# Altium PCB urbanturbine_rev4.PcbDoc
Units mil, origin at the board's own origin, x right, y up, seen from the top; angles counter-clockwise.
Board outline 3680 x 3690 mil, 2 copper layers (Top Layer, Bottom Layer); 52 components, 48 nets, 213 pads, 11 vias.
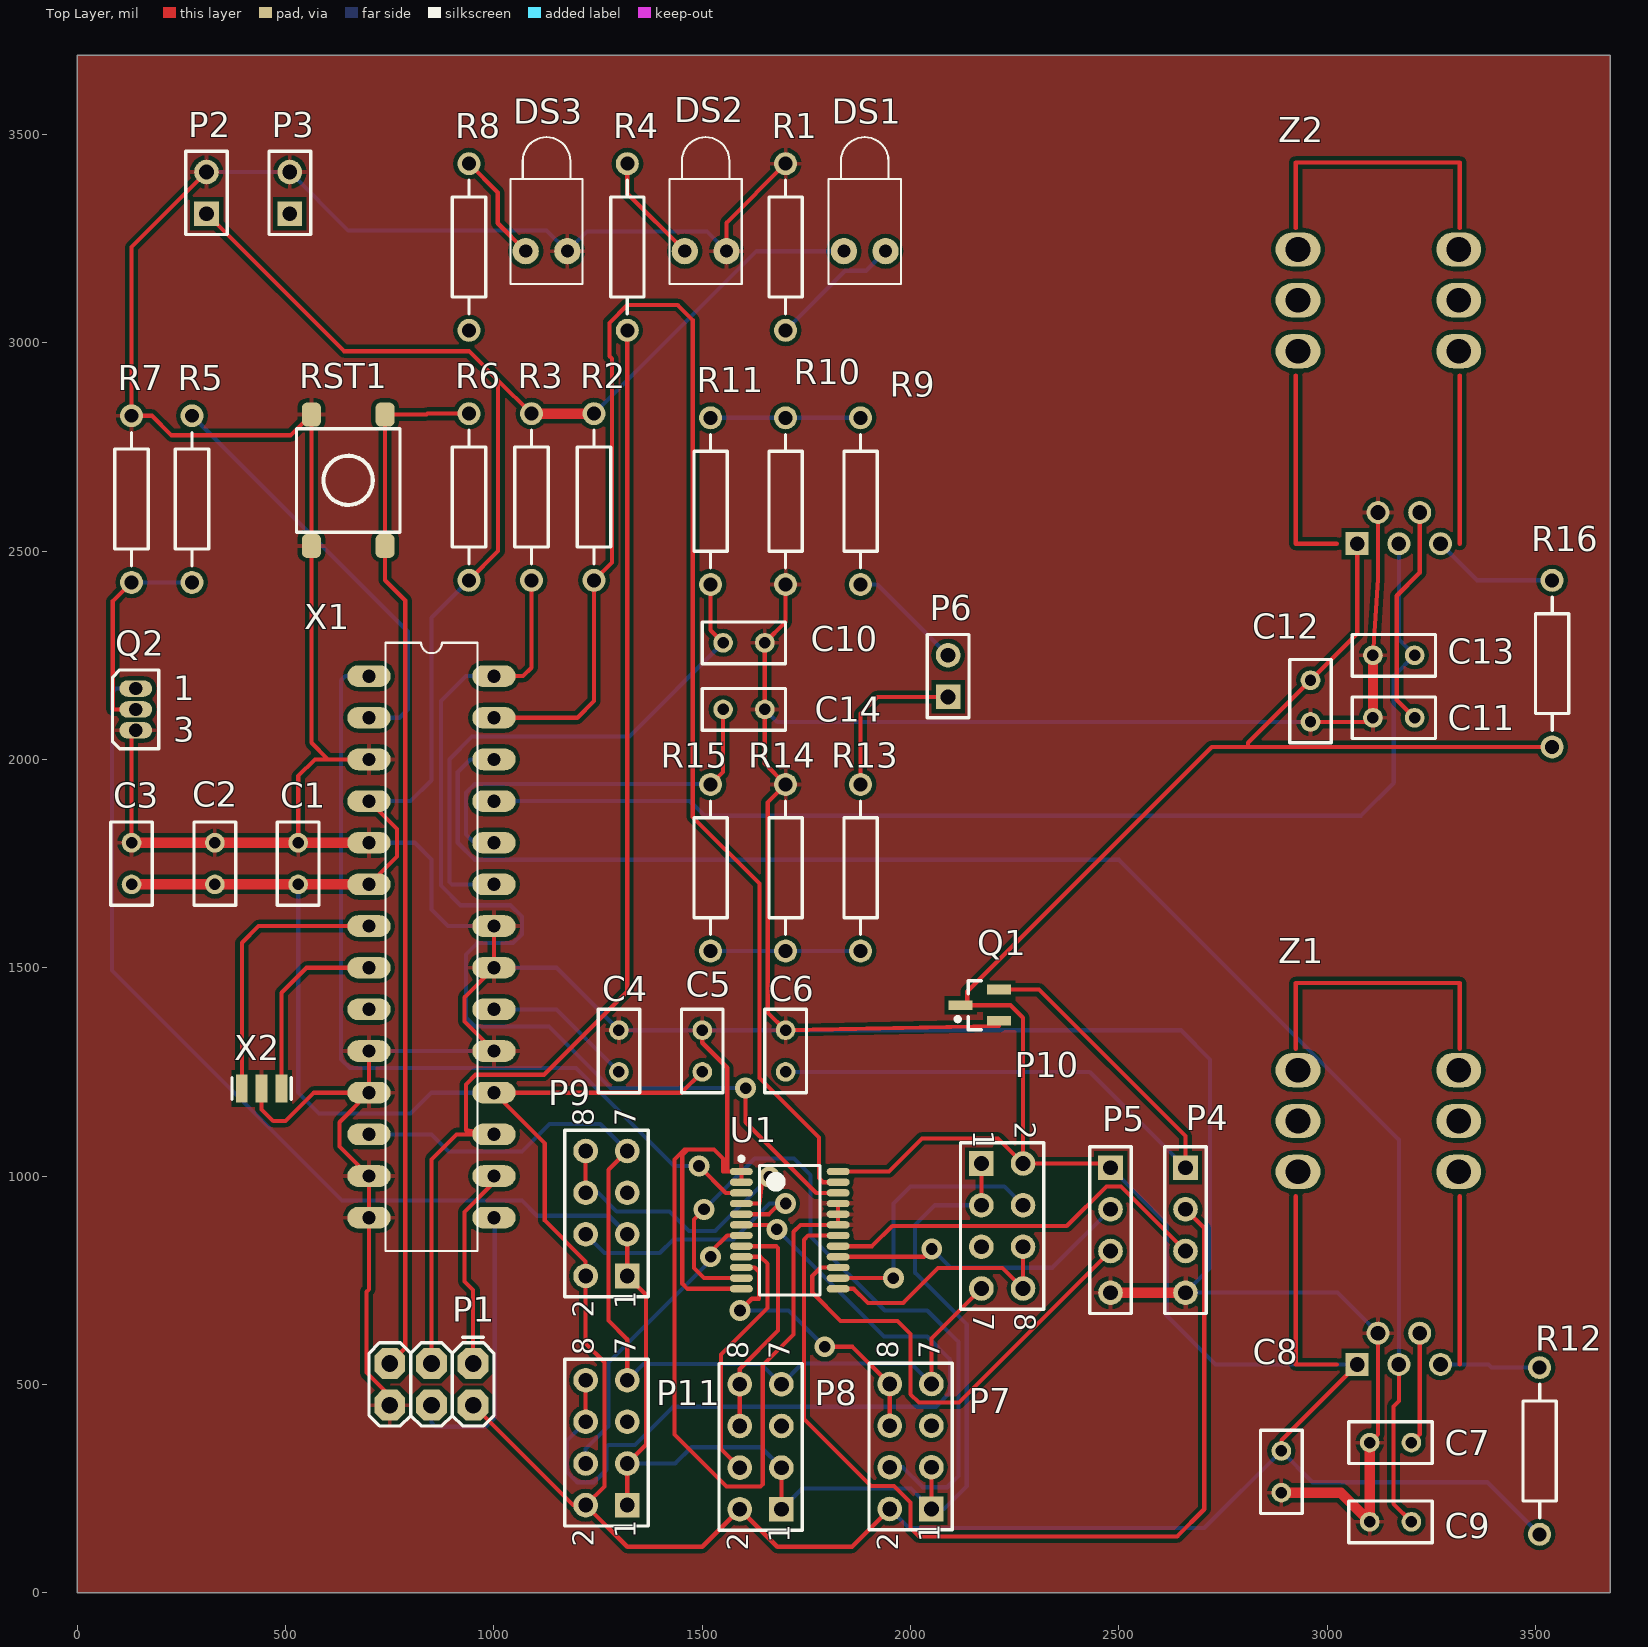
[diagram p0: Top Layer view]
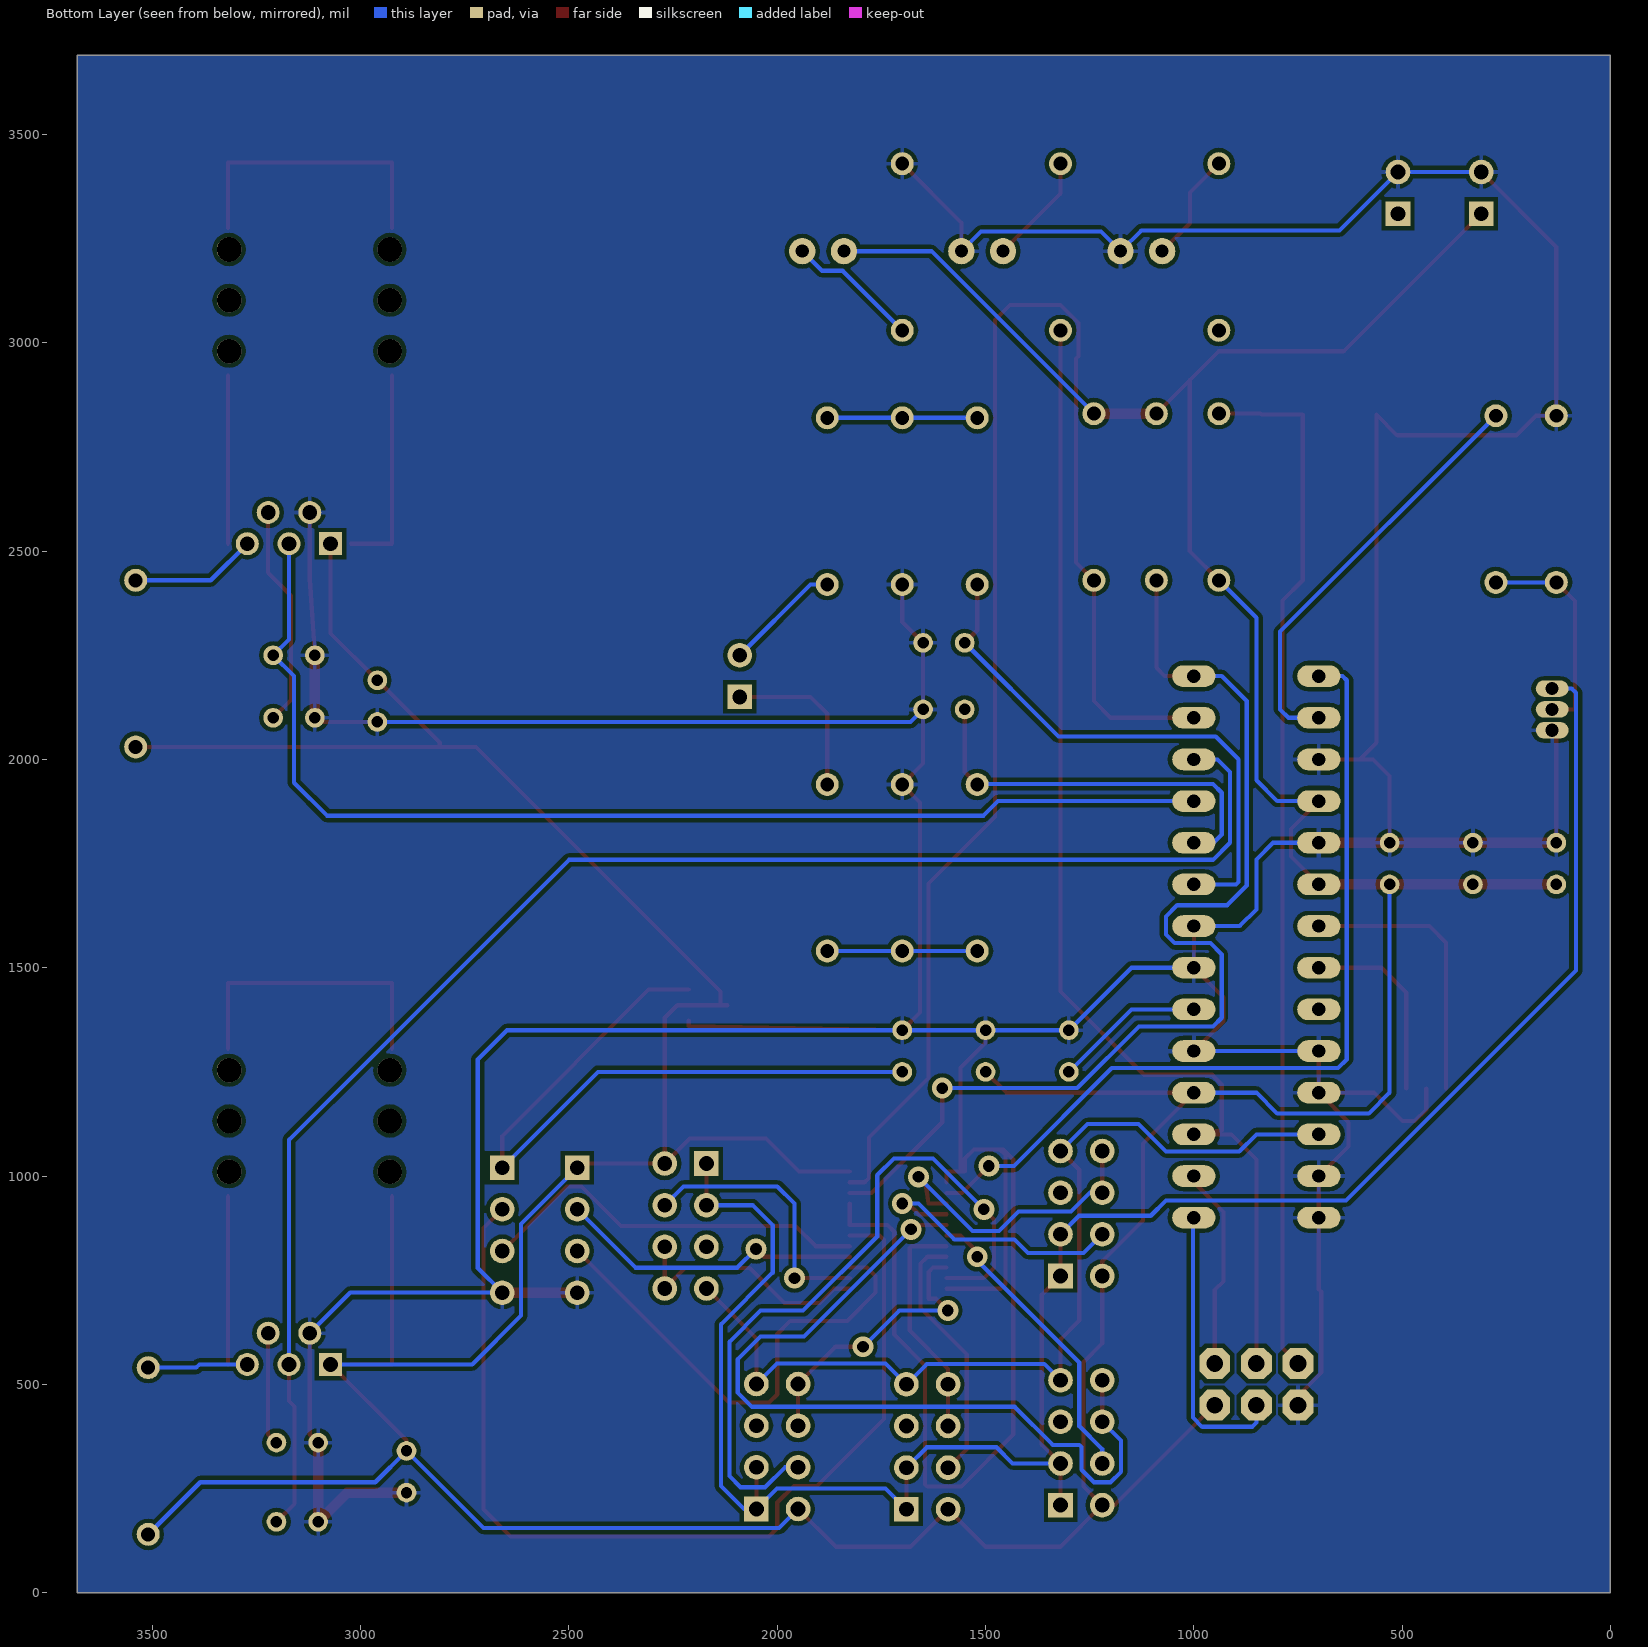
[diagram p1: Bottom Layer view, seen from below]

## Layer stack, top to bottom
Top Solder: solder mask 0.4, Solder Resist, Dk 3.5
Top Layer: signal copper 1.4
Dielectric 1: dielectric 12.6, FR-4, Dk 4.8
Bottom Layer: signal copper 1.4
Bottom Solder: solder mask 0.4, Solder Resist, Dk 3.5

## Board outline
0,0 3680,0 3680,3690 0,3690

## Design rules (kind name [scope] priority, off if disabled: settings)
Clearance [All] p1: gap=10 ignorepadtopadclearanceinfootprint=FALSE except(0: Arc-Hole Track-Hole SMDPad-Hole THPad-Hole Via-Hole Fill-Hole Poly-Hole Region-Hole Text-Hole; 1: SMDPad-SMDPad)
PolygonConnect [All] p1: connectstyle=Relief reliefconductorwidth=10 reliefentries=4 polygonreliefangle="90 Angle" airgapwidth=10
RoutingVias [All] p1: holewidth=28 width=50 viastyle="Through Hole" minholewidth=28 minwidth=50 maxholewidth=28 maxwidth=50
SolderMaskExpansion [All] p1: expansion=4
Width [All] p1: maxlimit=25 minlimit=10 preferedwidth=10 minimp=50.000000 maximp=50.000000 favimp=50.000000
30 further rules are at their usual default settings.

## Classes and differential pairs
component class urbanturbine: C1 C2 C3 C4 C5 C6 DS1 DS2 DS3 P1 P2 P3 P4 P5 Q1 Q2 R1 R2 R3 R4 R5 R6 R7 R8 RST1 U1 X1 X2
component class sensors: C7 C8 C9 C10 C11 C12 C13 C14 P6 R9 R10 R11 R12 R13 R14 R15 R16 Z1 Z2
component class displays: P7 P8 P9 P10 P11

## Components (designator, comment, footprint, x,y, rotation, side; value= is the part's Value field where it differs from the comment)
C1 "Cap Pol1" RAD-0.1 530,1750 r90 top value=100pF
C2 "Cap Pol1" RAD-0.1 330,1750 r90 top value=0.1uF
C3 "Cap Pol1" RAD-0.1 130,1750 r90 top value=0.1uF
C4 "C1005X7R1H104K050BB" RAD-0.1 1300,1300 r270 top value=0.1uF
C5 "Cap" RAD-0.1 1500,1300 r270 top value=1uF
C6 "Cap" RAD-0.1 1700,1300 r270 top value=1uF
C7 "Cap" RAD-0.1 3152.13,360 r180 top value=47uF
C8 "Cap" RAD-0.1 2890,290 r90 top value=47uF
C9 "Cap" RAD-0.1 3152.13,170 r180 top value=4.7uF
C10 "Cap" RAD-0.1 1600,2280 r180 top value=100nF
C11 "Cap" RAD-0.1 3160,2100 r180 top value=47uF
C12 "Cap" RAD-0.1 2960,2140 r90 top value=47uF
C13 "Cap" RAD-0.1 3160,2250 r180 top value=4.7uF
C14 "Cap" RAD-0.1 1600,2120 r180 top value=100nF
DS1 "LTST-C191KGKT" LED-1 1890,3220 r90 top
DS2 "LTST-C191KRKT" LED-1 1508.07,3220 r90 top
DS3 "LTST-C191KRKT" LED-1 1126.14,3220 r90 top
P1 "M20-9980346" 2X3 950,550 r180 top
P2 "" HDR1X2 310,3310 r90 top
P3 "" HDR1X2 510,3310 r90 top
P4 "" HDR1X4 2660,1020 r270 top
P5 "" HDR1X4 2480,1020 r270 top
P6 "" HDR1X2 2090,2150 r90 top
P7 "" HDR2X4 2050,200.78 r90 top
P8 "SPEED_DISP" HDR2X4 1690,200 r90 top
P9 "TEMP_DISP" HDR2X4 1320,760 r90 top
P10 "CRANK_DISP" HDR2X4 2170,1030 r270 top
P11 "HUMIDITY_DISP" HDR2X4 1320,210 r90 top
Q1 "AP2138N-3.3TRG1" SOT23_M 2166.26,1410 r180 top
Q2 "MOSFET-N" E3 140,2120 r0 top
R1 "RC0603JR-071KL" AXIAL-0.4 1700,3230 r90 top value=1k
R2 "Res2" AXIAL-0.4 1240,2630 r90 top value=4.7k
R3 "Res2" AXIAL-0.4 1090,2630 r90 top value=4.7k
R4 "Res1" AXIAL-0.4 1320,3230 r90 top value=1k
R5 "ERJ-3EKF1002V" AXIAL-0.4 275,2625 r90 top value=100
R6 "Res1" AXIAL-0.4 940,2630 r90 top value=1k
R7 "Res2" AXIAL-0.4 130,2625 r90 top value=1M
R8 "Res1" AXIAL-0.4 940,3230 r90 top value=1k
R9 "Res2" AXIAL-0.4 1880,2620 r270 top value=90k
R10 "Res2" AXIAL-0.4 1700,2620 r270 top value=10k
R11 "Res2" AXIAL-0.4 1520,2620 r90 top value=10
R12 "Res2" AXIAL-0.4 3510,340 r270 top value=10k
R13 "Res2" AXIAL-0.4 1880,1740 r90 top value=90k
R14 "Res2" AXIAL-0.4 1700,1740 r90 top value=10k
R15 "Res2" AXIAL-0.4 1520,1740 r270 top value=10
R16 "Res2" AXIAL-0.4 3540,2230 r270 top value=10k
RST1 "PTS645SH50SMTR92 LFS" "TACTILE SWITCH SMD" 650,2670 r90 top
U1 "TCA9548A" TCA9548A 1710,870 r0 top
X1 "ATMEGA328P-MU" *DIL28 850,1550 r0 top
X2 "16MHz" RESONATOR-SMD 442.38,1210 r0 top
Z1 "LEM HO-25P" HO-25 3022.91,547.8 r90 top
Z2 "LEM HO-6P" HO-25 3022.91,2517.8 r90 top

## Footprints (in the part's own frame and the unit in brackets; to place one, negate y for a bottom-side part, rotate by r counter-clockwise, add the part's x,y. Pads: shape width x height; smd on the part's side, far side on the other; paste and mask are expansions set on the pad)
2X3 [mil] "2X3"
  oct 74x74 hole 40: 1(0,0) 2(0,100) 3(100,0) 4(100,100) 5(200,0) 6(200,100)
  silkscreen extent -50,-63 250,150, body extent -50,-49 250,149, height 335
*DIL28 [mil]
  oval 104x52 hole 32: 1(-150,650) 2(-150,550) 3(-150,450) 4(-150,350) 5(-150,250) 6(-150,150) 7(-150,50) 8(-150,-50) 9(-150,-150) 10(-150,-250) 11(-150,-350) 12(-150,-450) 13(-150,-550) 14(-150,-650) 15(150,-650) 16(150,-550) 17(150,-450) 18(150,-350) 19(150,-250) 20(150,-150) 21(150,-50) 22(150,50) 23(150,150) 24(150,250) 25(150,350) 26(150,450) 27(150,550) 28(150,650)
  silkscreen extent -110,-730 110,730, body extent -315,-730 110,730, height 314
AXIAL-0.4 [mm] "Axial Device, Thru-Hole; 2 Leads; 0.4 in Pin Spacing"
  round 1.4 hole 0.85: 1(-5.08,0) 2(5.08,0)
  silkscreen extent -4.06,-1.02 4.06,1.02
E3 [mm] "TO, Flat Index; 3 In-Line, Axial Leads; Body Dia. 4.6mm; Lead Dia. 0.5 mm (max)"
  oval 2x1 hole 0.8: 1(0,1.27) 2(0,0) 3(0,-1.27)
  silkscreen extent -1.41,-2.41 1.41,2.41
HDR1X2 [mm] "Connector; Header; 2 Position"
  rect 1.5x1.5 hole 0.9: 1(0,0)
  round 1.5 hole 0.9: 2(2.54,0)
  silkscreen extent -1.27,-1.27 3.81,1.27
HDR1X4 [mm] "Connector; Header; 4 Position"
  rect 1.5x1.5 hole 0.9: 1(0,0)
  round 1.5 hole 0.9: 2(2.54,0) 3(5.08,0) 4(7.62,0)
  silkscreen extent -1.27,-1.27 8.89,1.27
HDR2X4 [mm] "Connector; Header; 4x2 Position"
  rect 1.5x1.5 hole 0.9: 1(0,0)
  round 1.5 hole 0.9: 2(0,2.54) 3(2.54,0) 4(2.54,2.54) 5(5.08,0) 6(5.08,2.54) 7(7.62,0) 8(7.62,2.54)
  silkscreen extent -1.27,-1.27 8.89,3.81
HO-25 [mm]
  rect 1.4x1.4 / inner rect 2.5x1.4 / far side rect 1.4x1.4 hole 0.9: 1(0,-1.25)
  round 1.4 / inner oval 2.5x1.4 / far side round 1.4 hole 0.9: 2(1.905,-2.52) 3(0,-3.79) 4(1.905,-5.06) 5(0,-6.33)
  oval 2.1x2.74 / inner round 1.5 / far side round 1.5 hole 1.5: ""(11.74,-7.44) ""(11.74,2.36) ""(14.84,-7.44) ""(14.84,2.36) ""(17.94,-7.44) ""(17.94,2.36)
  Top Layer lines w0.254: 10.25,2.5 0,2.5 0,0 ; 19.25,2.5 23.25,2.5 23.25,-7.5 19.25,-7.5 ; 0,-7.5 10.25,-7.5
  body extent -0.22,-8.5 23.72,3.5, height 20.8
LED-1 [mm] "LED; 2 Leads"
  round 1.6 hole 0.8: 1(0,1.27) 2(0,-1.27)
  silkscreen extent -2,-2.2 6.95,2.2
RAD-0.1 [mm] "Radial Cap, Thru-Hole; 2 Leads; 0.1 in Pin Spacing"
  round 1.2 hole 0.7: 1(-1.27,0) 2(1.27,0)
  silkscreen extent -2.54,-1.27 2.54,1.27
RESONATOR-SMD [mil] "RESONATOR-SMD"
  rect 28x67 smd: 1(-47.62,0) 2(-0.38,0) 3(47.62,0)
  silkscreen extent -71,-26 71,26
SOT23_M [mm] "SOT23, 3-Leads, Body 2.9x1.3mm, Pitch 0.95mm, Lead Span 2.3mm - Reverse Pinning, IPC Low Density"
  rect 1.45x0.6 smd: 1(1.175,0) 2(-1.175,-0.95) 3(-1.175,0.95)
  silkscreen extent -0.1,-1.5 1.47,1.5, body extent -0.7,-1.5 0.7,1.5, height 1.1
"TACTILE SWITCH SMD" [mil] "Switch, Through-Hole, 4 Leads, Body 8.5x8.5mm, Row Spacing 9.0mm, Pitch 4.5mm"
  rrect50% 57x45 smd: 1(157.87,-88.58) 2(-157.48,-88.58) 3(157.87,88.19) 4(-157.48,88.19)
  silkscreen extent -124,-124 124,124, body extent -177,-122 177,122, height 177
TCA9548A [mm] "TSOP, 24-Leads, Body 7.80x4.40mm, Pitch 0.65mm, IPC Medium Density"
  oval 1.4x0.45 smd: 1(-2.95,3.575) 2(-2.95,2.925) 3(-2.95,2.275) 4(-2.95,1.625) 5(-2.95,0.975) 6(-2.95,0.325) 7(-2.95,-0.325) 8(-2.95,-0.975) 9(-2.95,-1.625) 10(-2.95,-2.275) 11(-2.95,-2.925) 12(-2.95,-3.575) 13(2.95,-3.575) 14(2.95,-2.925) 15(2.95,-2.275) 16(2.95,-1.625) 17(2.95,-0.975) 18(2.95,-0.325) 19(2.95,0.325) 20(2.95,0.975) 21(2.95,1.625) 22(2.95,2.275) 23(2.95,2.925) 24(2.95,3.575)
  silkscreen extent -3.07,-3.95 1.85,4.47, body extent -3.27,-3.96 3.28,3.93, height 1.2

## Part data
C1 C2 C3 C4: library part Cap, "Capacitor", LatestRevisionDate=17-Jul-2002, LatestRevisionNote="Re-released for DXP Platform.", PackageDescription="Radial Cap, Thru-Hole; 2 Leads; 0.3 in Pin Spacing", PackageReference=RAD-0.3, Published=8-Jun-2000, Publisher="Altium Limited"
C5 C6 C7 C8 C9 C10 C11 C12 C13 C14: "Capacitor", LatestRevisionDate=17-Jul-2002, LatestRevisionNote="Re-released for DXP Platform.", PackageDescription="Radial Cap, Thru-Hole; 2 Leads; 0.3 in Pin Spacing", PackageReference=RAD-0.3, Published=8-Jun-2000, Publisher="Altium Limited"
DS1 DS2 DS3: library part LED1, "Typical RED GaAs LED", LatestRevisionDate=08-Jul-2005, LatestRevisionNote="Mech Layer 1 removed.", PackageDescription="LED; 2 Leads", PackageReference=LED-1, Published=8-Jun-2000, Publisher="Altium Limited"
P1: "DIL VERTICAL PC TAIL PIN HEADER", Color=Black, Manufacturer="Harwin Inc.", Supplier Part Number 1=952-2121-ND, Category="Connectors, Interconnects", ComponentLink1Description=http://cdn.harwin.com/pdfs/M20-998.pdf, ComponentLink1URL=http://cdn.harwin.com/pdfs/M20-998.pdf, Connector Type="Header, Unshrouded, Breakaway", Contact Finish=Tin, Contact Finish Thickness=-, Contact Mating Length="0.240\" (6.10mm)", Contact Type="Male Pin", Fastening Type=-, Features=-, Manufacturer Part Number=M20-9980346, Mounting Type="Through Hole", Number of Positions=6, Number of Positions Loaded=All, Number of Rows=2, Packaging=Bulk, Pitch="0.100\" (2.54mm)", Pricing 1="1=0.32, 10=0.299, 25=0.2552, 50=0.2232, 100=0.2072, 250=0.18336, 500=0.17534, 1000=0.14346, 2500=0.13151 (CAD)", RoHS="RoHS Compliant", Row Spacing="0.100\" (2.54mm)", Stock 1=14297, Supplier 1=Digi-Key, Termination=Solder
P2 P3 P6: library part "Header 2", "Header, 2-Pin", LatestRevisionDate=17-Jul-2002, LatestRevisionNote="Re-released for DXP Platform.", Publisher="Altium Limited"
P4 P5: library part "Header 4", "Header, 4-Pin", LatestRevisionDate=17-Jul-2002, LatestRevisionNote="Re-released for DXP Platform.", Publisher="Altium Limited"
P7 P8 P9 P10 P11: library part "Header 4X2", "Header, 4-Pin, Dual row", LatestRevisionDate=17-Jul-2002, LatestRevisionNote="Re-released for DXP Platform.", Publisher="Altium Limited"
Q1: "IC REG LINEAR 3.3V 250MA SOT23-3"
Q2: "N-Channel MOSFET", LatestRevisionDate=17-Jul-2002, LatestRevisionNote="Re-released for DXP Platform.", PackageDescription="TO, Flat Index; 3 In-Line, Axial Leads; Body Dia. 4.6mm; Lead Dia. 0.5 mm (max)", PackageReference=E3, PackageVersion=1995/1996, Published=8-Jun-2000, Publisher="Altium Limited"
R1 R4 R5 R6 R8: library part Res2, "Resistor", LatestRevisionDate=17-Jul-2002, LatestRevisionNote="Re-released for DXP Platform.", PackageDescription="Axial Device, Thru-Hole; 2 Leads; 0.4 in Pin Spacing", PackageReference=AXIAL-0.4, Published=8-Jun-2000, Publisher="Altium Limited"
R2 R3 R7 R9 R10 R11 R12 R13 R14 R15 R16: "Resistor", LatestRevisionDate=17-Jul-2002, LatestRevisionNote="Re-released for DXP Platform.", PackageDescription="Axial Device, Thru-Hole; 2 Leads; 0.4 in Pin Spacing", PackageReference=AXIAL-0.4, Published=8-Jun-2000, Publisher="Altium Limited"
RST1: "SWITCH TACTILE SPST-NO 0.05A 12V", Contact Rating @ Voltage="0.05A @ 12VDC", Illumination Type, Color=-, Manufacturer="C&K Components", Operating Force=200gf, Operating Temperature="-20°C ~ 60°C", Supplier Part Number 1=CKN9085CT-ND, Actuator Height off PCB, from Pins=5.00mm, Actuator Material="Polyamide (PA66), Nylon 6/6", Actuator Orientation="Top Actuated", Actuator Type=Standard, Category=Switches, Circuit=SPST-NO, ComponentLink1Description=http://www.ck-components.com/14409/pts645_25apr13.pdf/, ComponentLink1URL=http://www.ck-components.com/14409/pts645_25apr13.pdf/, Features=-, Illumination=Non-Illuminated, Illumination Voltage (Nominal)=-, Ingress Protection=-, Manufacturer Part Number="PTS645SH50SMTR92 LFS", Mechanical Life="100,000 Cycles", Mounting Type="Surface Mount", Outline="6.00mm x 6.00mm", Packaging="Cut Tape (CT)", Pricing 1="1=0.43, 10=0.418, 25=0.404, 50=0.3892, 100=0.3675, 250=0.34592, 500=0.3315 (CAD)", RoHS="RoHS Compliant", Stock 1=49163, Supplier 1=Digi-Key, Switch Function=Off-Mom, Switch Travel=-, Termination Style="Gull Wing"
U1: "IIC multiplexor"
X1: "IC MCU 8BIT 32KB FLASH 32QFN", Manufacturer=Atmel, Operating Temperature="-40°C ~ 85°C", Package / Case="32-VFQFN Exposed Pad", Supplier Device Package="32-VQFN (5x5)", Supplier Part Number 1=ATMEGA328P-MU-ND, Voltage - Supply (Vcc/Vdd)="1.8 V ~ 5.5 V", Category="Integrated Circuits (ICs)", ComponentLink1Description=http://www.atmel.com/images/atmel-8271-8-bit-avr-microcontroller-atmega48a-48pa-88a-88pa-168a-168pa-328-328p_datasheet_summary.pdf, ComponentLink1URL=http://www.atmel.com/images/atmel-8271-8-bit-avr-microcontroller-atmega48a-48pa-88a-88pa-168a-168pa-328-328p_datasheet_summary.pdf, Connectivity="I²C, SPI, UART/USART", Core Processor=AVR, Core Size=8-Bit, Data Converters="A/D 8x10b", EEPROM Size="1K x 8", Manufacturer Part Number=ATMEGA328P-MU, Number of I/O=23, Oscillator Type=Internal, Packaging=Tray, Peripherals="Brown-out Detect/Reset, POR, PWM, WDT", Pricing 1="1=5.01, 10=4.465, 100=3.6608, 250=3.30364, 500=2.96432, 1000=2.50003 (CAD)", Program Memory Size="32KB (16K x 16)", Program Memory Type=FLASH, RAM Size="2K x 8", RoHS="RoHS Compliant", Speed=20MHz, Stock 1=70195, Supplier 1=Digi-Key
X2: library part CSTNE16M0VH3C000R0, "CER RESONATOR 16MHZ SMD", Capacitance=33pF, Frequency=10MHz, Frequency Stability=±0.2%, Frequency Tolerance=±0.5%, Manufacturer="Murata Electronics North America", Manufacturer Part Number=CSTCE10M0G55Z-R0, Operating Temperature="-40°C ~ 125°C", Package / Case="3-SMD, Non-Standard", Supplier Part Number 1=490-4715-1-ND, Category="Crystals and Oscillators", ComponentLink1Description=http://www.murata.com/~/media/webrenewal/support/library/catalog/products/timingdevice/ceralock/p16e.ashx, ComponentLink1URL=http://www.murata.com/~/media/webrenewal/support/library/catalog/products/timingdevice/ceralock/p16e.ashx, Features="Built in Capacitor", Height="0.031\" (0.80mm)", Impedance=-, Mounting Type="Surface Mount", Packaging="Cut Tape (CT)", Pricing 1="1=0.69, 10=0.573, 50=0.5166, 100=0.4596, 500=0.43548, 1000=0.36763 (CAD)", RoHS="RoHS Compliant", Size / Dimension="0.126\" L x 0.051\" W (3.20mm x 1.30mm)", Stock 1=14995, Supplier 1=Digi-Key, Type=Ceramic
Z1: "Hall Effect Current Sensor"
Z2: library part "LEM HO-25P", "Hall Effect Current Sensor"

## Via types
v1: diameter 50, hole 28, Top Layer to Bottom Layer, 11 vias

## Nets (pads, with @x,y where several pads share a name; then routed paths per layer and width w, separated by ;. In a path a pad name is that pad's centre, name@x,y a point inside that pad or via, vN(x,y) a via of type N, cw(c..) or ccw(c..) an arc to the next point about the centre after c; other vN are vias at no path point)
3.3V: C6.2 P4.1 Q1.2 | length 1724.3
  Top Layer w10: Q1.2 2308.6,1447.4 2660,1096 P4.1
  Bottom Layer w10: C6.2 2430,1250 P4.1
+5: C1.1 C2.1 C3.1 C5.2 C8.2 C12.2 DS1.1 P1.2 P2.1 P5.1 P7.2 P8.2 P9.2 P10.2 P11.2 Q1.1 R2.2 R3.2 R6.1 R12.2 R16.2 U1.24 X1.4 X1.6 X1.18 Z1.1 Z2.1 | length 14259.6
  Top Layer w10: P2.1 640.06,2979.94 940.06,2979.94 1010,2910 ; X1.6 767,1767 767,1833 X1.4 ; R6.1 1010,2500 1010,2910 ; P1.2 1190,210 P11.2 ; R3.2 1010,2910 ; C5.2 1450,1200 X1.18 1122,1078 1122,893 1220,795 P9.2 1220,598 1265,553 1265,255 P11.2 ; U1.24 1948,1010.75 2027.25,1090 2210,1090 P10.2 ; P7.2 1859.22,110 1680,110 P8.2 1500,110 1320,110 P11.2 ; Q1.1 Q1.1@2135.35,1410 ; P5.1 2470,1030 P10.2 ; C8.2 2890,365.67 Z1.1 ; Z2.1 3072.13,2302.13 C12.2 2810,2040 2810,2030 ; R16.2 2810,2030 ; Q1.1@2135.35,1410 2240,1410 2270,1380 P10.2 ; Q1.1@2135.35,1410 2136.04,1410.69 2136.04,1443.1 2722.94,2030 2810,2030
  Top Layer w25: C3.1 C2.1 C1.1 X1.6 ; R3.2 R2.2
  Bottom Layer w10: C1.1 530,1200 580,1150 800,1150 850,1200 X1.18 ; X1.4 800,1900 850,1950 850,2340 R6.1 ; R2.2 1630,3220 DS1.1 ; P7.2 1995.78,155 2705,155 C8.2 2965,265 3385,265 R12.2 ; P5.1 2615,885 2615,665 2732.2,547.8 Z1.1
BME_C: P5.2 U1.16 | length 738.3
  Top Layer w10: U1.16 2032.02,806.02 v1(2051,825)
  Bottom Layer w10: v1(2051,825) 2096,780 2340,780 P5.2
BME_D: P5.3 U1.15 | length 1171.7
  Top Layer w10: U1.15 1784.43,780.43 1764,760 1764,720 1832,652 1969,652 2000,621 2000,476 2020,456 2116,456 P5.3
COMP_IN: P3.1
CRANK_C: P10.4 U1.14 | length 658.4
  Top Layer w10: U1.14 v1(1958.65,754.84)
  Bottom Layer w10: v1(1958.65,754.84) 1958.65,933.65 2000,975 2225,975 P10.4
CRANK_CURRENT: C13.1 X1.25 Z2.3 | length 2817.4
  Bottom Layer w10: X1.25 1470,1900 1505,1865 3081,1865 3160,1944 3160,2200 C13.1 3172.13,2287.87 Z2.3
CRANK_D: P10.6 P10.8 U1.13 | length 612.9
  Top Layer w10: U1.13 1863.65,729.25 1897.63,695.27 1982.27,695.27 2066,779 2221,779 P10.8 P10.6
CRANK_IN_+: P6.2 R9.2 | length 280.4
  Bottom Layer w10: R9.2 1920,2420 P6.2
CRANK_VOLTAGE: C10.2 R11.1 X1.23 | length 1329.2
  Top Layer w10: R11.1 1520,2310 C10.2
  Bottom Layer w10: X1.23 899,1700 893,1706 893,2000.5 947.5,2055 1325,2055 C10.2
DISPLAY_GND: P7.1 P7.3 P8.1 P8.3 P9.1 P9.3 P10.1 P10.3 P11.1 P11.3 Q2.1 | length 4986.4
  Top Layer w10: P11.1 P11.3 1365,355 1365,715 P9.1 P9.3 ; P8.1 P8.3 ; P7.1 P7.3 ; P10.3 P10.1
  Bottom Layer w10: Q2.1 93,2170 83,2160 83,1493 635,941 1067,941 1103.47,904.53 1275.47,904.53 P9.3 ; P11.3 1435,310 1474,349 1641,349 P8.3 ; P8.1 1740,250 2000.78,250 P7.1 2080,200.78 2135,255.78 2135,644 2011,768 2011,882 2059,930 P10.3
DISPLAY_RES: P7.7 P8.7 P9.7 P10.7 P11.7 X1.12 | length 2365
  Top Layer w10: P11.7 1320,608 1275,653 1275,1015 P9.7 ; P7.7 2050,610 P10.7
  Bottom Layer w10: X1.12 850,1100 891,1059 1067,1059 1133,1125 1255,1125 P9.7 ; P11.7 1359,549 1641,549 P8.7 1740,550 2000.78,550 P7.7
DISPLAY_TOGGLE: R5.2 X1.2 | length 1020.8
  Bottom Layer w10: R5.2 793,2307 793,2120 773,2100 X1.2
GND: C1.2 C2.2 C3.2 C4.1 C5.1 C6.1 C7.2 C8.1 C9.2 C10.1 C11.2 C12.1 C13.2 C14.1 DS2.2 DS3.2 P1.6 P2.2 P3.2 P4.4 P5.4 Q1.3 Q2.3 R1.2 R7.2 R10.2 R14.2 RST1.3 RST1.4 U1.1 U1.2 U1.12 U1.19 U1.20 U1.21 X1.3 X1.5 X1.10 X1.11 X1.13 X1.14 X1.19 X1.21 X1.22 X2.2 Z1.2 Z2.2 | length 17425.6
  Top Layer w10: C3.2 130,2070 Q2.3 ; P2.2 130,3230 R7.2 179,2825 226,2778 511.94,2778 RST1.3 RST1.4 561.81,2040 601.81,2000 ; X2.2 442,1160 470,1132 499.53,1132 567.53,1200 X1.11 ; C1.2 530,1960 570,2000 601.81,2000 ; X1.10 X1.11 ; X1.3 601.81,2000 ; P1.6 750,472 694,528 694,722 700,728 X1.14 X1.13 629,1071 629,1129 X1.11 ; X1.19 929,1371 929,1429 X1.21 X1.22 ; C5.1 1500,1320 1560,1260 1560,1010.75 ; DS2.2 1558.07,3288.07 R1.2 ; U1.12 1464.29,729.25 1452,741.54 1452,1050 1466,1064 ; U1.2 U1.1 1560,1010.75 ; R10.2 1700,2330 C10.1 C14.1 1650,1990 R14.2 1657,1897 1657,1393 C6.1 2212.52,1360 Q1.3 ; U1.21 U1.20 U1.19 1735.8,882.8 1719.27,866.27 1719.27,619.27 1645,545 1645,260 1640,255 1558,255 1433.45,379.55 1433.45,1040 1457.45,1064 1466,1064 ; C12.1 3100,2090 C11.2 ; C7.2 3122.13,380 Z1.2 ; C13.2 3122.13,2433.13 Z2.2 ; 1466,1064 1528,1064 1550,1042 1550,1010.75 1560,1010.75
  Top Layer w25: C3.2 C2.2 C1.2 X1.5 ; P5.4 P4.4 ; C8.1 3032.13,240 C9.2 C7.2 ; C11.2 C13.2
  Bottom Layer w10: P2.2 P3.2 650,3270 1126.14,3270 DS3.2 1223.14,3267 1511.07,3267 DS2.2 ; X1.10 X1.19 ; X1.5 810,1800 850,1760 850,1640 890,1600 X1.22 ; X1.21 1150,1500 C4.1 C5.1 C6.1 2649,1350 2719,1280 2719,779 P4.4 3024.92,720 Z1.2 ; C14.1 1680,2090 C12.1
HUMIDITY_C: P11.4 U1.7 | length 721.9
  Top Layer w10: v1(1520,806.02) 1520,817.2 1560,857.2 U1.7
  Bottom Layer w10: P11.4 1220,344.53 1275,399.53 1275,552 1520,797 v1(1520,806.02)
HUMIDITY_D: P11.6 P11.8 U1.6 | length 2004.8
  Top Layer w10: P11.6 P11.8 ; U1.6 1668.2,882.8 v1(1679,872)
  Bottom Layer w10: P11.6 1175,365 1175,290 1200,265 1240,265 1270,295 1270,349.53 1275,354.53 1338.53,354.53 1430,446 2061,446 2095,480 2095,560 2040,615 1936,615 v1(1679,872)
MISO: P1.1 X1.16 | length 488.1
  Top Layer w10: P1.1 950,726 929,747 929,914 1000,985 X1.16
MOSI: P1.4 X1.15 | length 689.3
  Bottom Layer w10: P1.4 850,408 860,398 980,398 1002,420 1002,900 X1.15
MUX_RST: U1.3 X1.1 | length 2074.7
  Top Layer w10: v1(1492,1024) 1556.43,959.57 U1.3
  Bottom Layer w10: X1.1 643,2200 633,2190 633,1280 654,1259 1197,1259 1432,1024 v1(1492,1024)
NetC4_2: C4.2 X1.20 | length 362.1
  Bottom Layer w10: X1.20 1150,1400 C4.2
NetC7_1: C7.1 Z1.4 | length 271.1
  Top Layer w10: C7.1 3222.13,380 Z1.4
NetC11_1: C11.1 Z2.4 | length 533.4
  Top Layer w10: C11.1 3167,2143 3167,2393 3222.13,2448.13 Z2.4
NetDS1_2: DS1.2 R1.1 | length 318.7
  Bottom Layer w10: R1.1 1843,3173 1893,3173 DS1.2
NetDS2_1: DS2.1 R4.2 | length 267.2
  Top Layer w10: R4.2 1320,3358.07 DS2.1
NetDS3_1: DS3.1 R8.2 | length 266.4
  Top Layer w10: R8.2 1009,3361 1009,3287.14 DS3.1
NetQ2_2: Q2.2 R5.1 R7.1 | length 523.1
  Top Layer w10: R7.1 85,2380 85,2121 86,2120 Q2.2
  Bottom Layer w10: R7.1 R5.1
NetR8_1: R8.1
NetR9_1: R9.1 R10.1 R11.2 | length 360
  Bottom Layer w10: R11.2 R10.1 R9.1
NetR12_1: R12.1 Z1.5 | length 241.1
  Bottom Layer w10: Z1.5 3387,547.8 3394.8,540 R12.1
NetR13_1: R13.1 R14.1 R15.2 | length 360
  Bottom Layer w10: R15.2 R14.1 R13.1
NetR16_1: R16.1 Z2.5 | length 304.2
  Bottom Layer w10: Z2.5 3359.92,2430 R16.1
NetX1_7: X1.7 X2.1 | length 671.8
  Top Layer w10: X2.1 394.76,1560 434.76,1600 X1.7
NetX1_8: X1.8 X2.3 | length 464.9
  Top Layer w10: X2.3 490,1440 550,1500 X1.8
PROX_C: P4.2 U1.18 | length 2395.5
  Top Layer w10: U1.18 1754.2,857.2 1744,847 1744,417 1905,256 1960,256 2000,216 2000,155 2020,135 2640,135 2705,200 2705,875 P4.2
PROX_D: P4.3 U1.17 | length 957.5
  Top Layer w10: U1.17 1907.61,831.61 1956,880 2375,880 2470,975 2505,975 P4.3
RST: P1.5 R6.2 RST1.1 RST1.2 | length 2515.6
  Top Layer w10: P1.5 787,587 787,2381.58 738.58,2430 RST1.2 RST1.1 838,2827.87 840.13,2830 R6.2
SCK: P1.3 R4.1 X1.17 | length 2909
  Top Layer w10: P1.3 850,1040 910,1100 X1.17 933,1110 933,1220 956,1243 1120,1243 1320,1443 R4.1
SCL: R3.1 U1.22 X1.28 | length 2591.9
  Top Layer w10: X1.28 1070,2200 1090,2220 R3.1 ; v1(1604,1211) 1604,1129.17 1773.61,959.57 U1.22
  Bottom Layer w10: X1.28 933,2200 873,2140 873,1697 920,1650 1040,1650 1067,1623 1067,1580 1046,1559 960,1559 933,1532 933,1380 954,1359 1132,1359 1280,1211 v1(1604,1211)
SDA: R2.1 U1.23 X1.27 | length 3653.2
  Top Layer w10: X1.27 1200,2100 1240,2140 R2.1 1283,2473 1283,2962 1277,2968 1277,3048 1320,3091 1441,3091 1477,3055 1477,1862 1637,1702 1637,1235 1779.84,1092.16 1779.84,995.32 1790,985.16 U1.23
SPEED_C: P8.4 U1.9 | length 623.8
  Top Layer w10: P8.4 1545,345 1545,571.86 1656.42,683.28 1656.42,789.61 1640,806.02 U1.9
SPEED_D: P8.6 P8.8 U1.8 | length 555.2
  Top Layer w10: P8.6 P8.8 1590,536.89 1682,628.89 1682,827 1677.39,831.61 U1.8
TEMP_C: P9.4 U1.5 | length 664.7
  Top Layer w10: U1.5 1660.39,908.39 1685.98,933.98 v1(1700,933.98)
  Bottom Layer w10: P9.4 1265,815 1398,815 1431,848 1575,848 1660.98,933.98 v1(1700,933.98)
TEMP_D: P9.6 P9.8 U1.4 | length 747.8
  Top Layer w10: P9.6 P9.8 ; U1.4 1636.98,933.98 1643.58,980.58 v1(1661,998)
  Bottom Layer w10: P9.6 1249.53,960 1294.53,915 1421,915 1468,868 1531,868 v1(1661,998)
TURBINE_C: P7.4 U1.11 | length 1722.7
  Top Layer w10: v1(1504,920) 1480,896 1480,779 1504.16,754.84 U1.11
  Bottom Layer w10: v1(1504,920) 1626,1042 1720,1042 1760,1002 1760,855 1938,677 2040,677 2115,602 2115,280 2088,253 2029.42,253 1981.64,300.78 P7.4
TURBINE_CURRENT: C9.1 X1.26 Z1.3 | length 3764.1
  Top Layer w10: Z1.3 3172.13,460.13 3159,447 3159,213.13 C9.1
  Bottom Layer w10: X1.26 943,2000 913,1970 913,1800 954,1759 2500,1759 3172.13,1086.87 Z1.3
TURBINE_D: P7.6 P7.8 U1.10 | length 701.9
  Top Layer w10: v1(1590.39,677) 1618.78,705.39 1636.42,705.39 1636.42,770 1625.98,780.43 U1.10 ; v1(1794,590) 1860.78,590 P7.8 P7.6
  Bottom Layer w10: v1(1590.39,677) 1707,677 v1(1794,590)
TURBINE_IN_+: P6.1 R13.2 | length 396.6
  Top Layer w10: R13.2 1880,2110 1920,2150 P6.1
TURBINE_VOLTAGE: C14.2 R15.1 X1.24 | length 964.4
  Top Layer w10: R15.1 1550,1970 C14.2
  Bottom Layer w10: X1.24 953,1800 933,1820 933,1920 954,1941 1520,1941 R15.1
pads on no net: P7.5 P8.5 P9.5 P10.5 P11.5 X1.9 Z1. Z2.

## Polygon pours and split planes (outlines as drawn)
GND on Top Layer "GND-Top" (solid, remove dead copper, pour order 0): 0,0 3680,0 3680,3690 0,3690
GND on Bottom Layer "GND-Bottom" (solid, pour order 1): 0,0 3680,0 3680,3690 0,3690

## Silkscreen, mask and mechanical layers (free items; w line width, h text height)
Mechanical 1:
  the board outline again, w10

## Text inside footprints (layer, text, board x,y; h text height)
P7: Top Overlay "2" at 1970,100.78 h50 r90; Top Overlay "1" at 2070,120.78 h50 r90; Top Overlay "7" at 2070,560.78 h50 r90; Top Overlay "8" at 1970,560.78 h50 r90
P8: Top Overlay "2" at 1610,100 h50 r90; Top Overlay "1" at 1710,120 h50 r90; Top Overlay "7" at 1710,560 h50 r90; Top Overlay "8" at 1610,560 h50 r90
P9: Top Overlay "2" at 1240,660 h50 r90; Top Overlay "1" at 1340,680 h50 r90; Top Overlay "7" at 1340,1120 h50 r90; Top Overlay "8" at 1240,1120 h50 r90
P10: Top Overlay "2" at 2250,1130 h50 r270; Top Overlay "1" at 2150,1110 h50 r270; Top Overlay "7" at 2150,670 h50 r270; Top Overlay "8" at 2250,670 h50 r270
P11: Top Overlay "2" at 1240,110 h50 r90; Top Overlay "1" at 1340,130 h50 r90; Top Overlay "7" at 1340,570 h50 r90; Top Overlay "8" at 1240,570 h50 r90
Q2: Top Overlay "1" at 229.57,2141.85 h59.05; Top Overlay "3" at 229.57,2042.72 h59.05